# Altium PCB TP3_PCB.PcbDoc
Units mm, origin at the board's own origin, x right, y up, seen from the top; angles counter-clockwise.
Board outline 41.1 x 58.6 mm, 2 copper layers (Top Layer, Bottom Layer); 36 components, 23 nets, 140 pads, 38 vias.
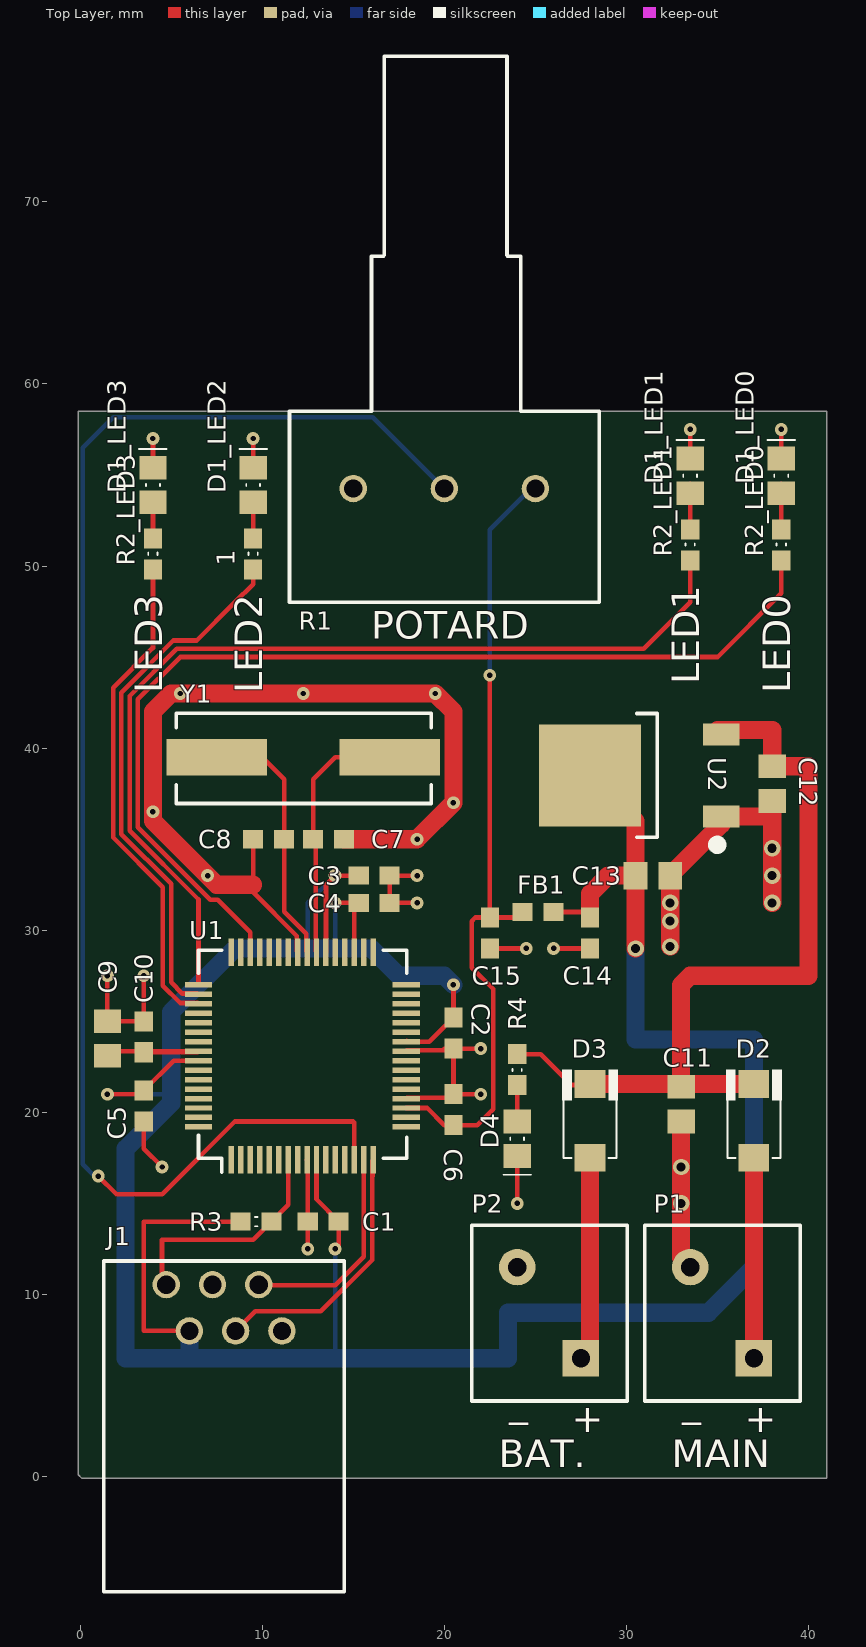
[diagram p0: Top Layer view]
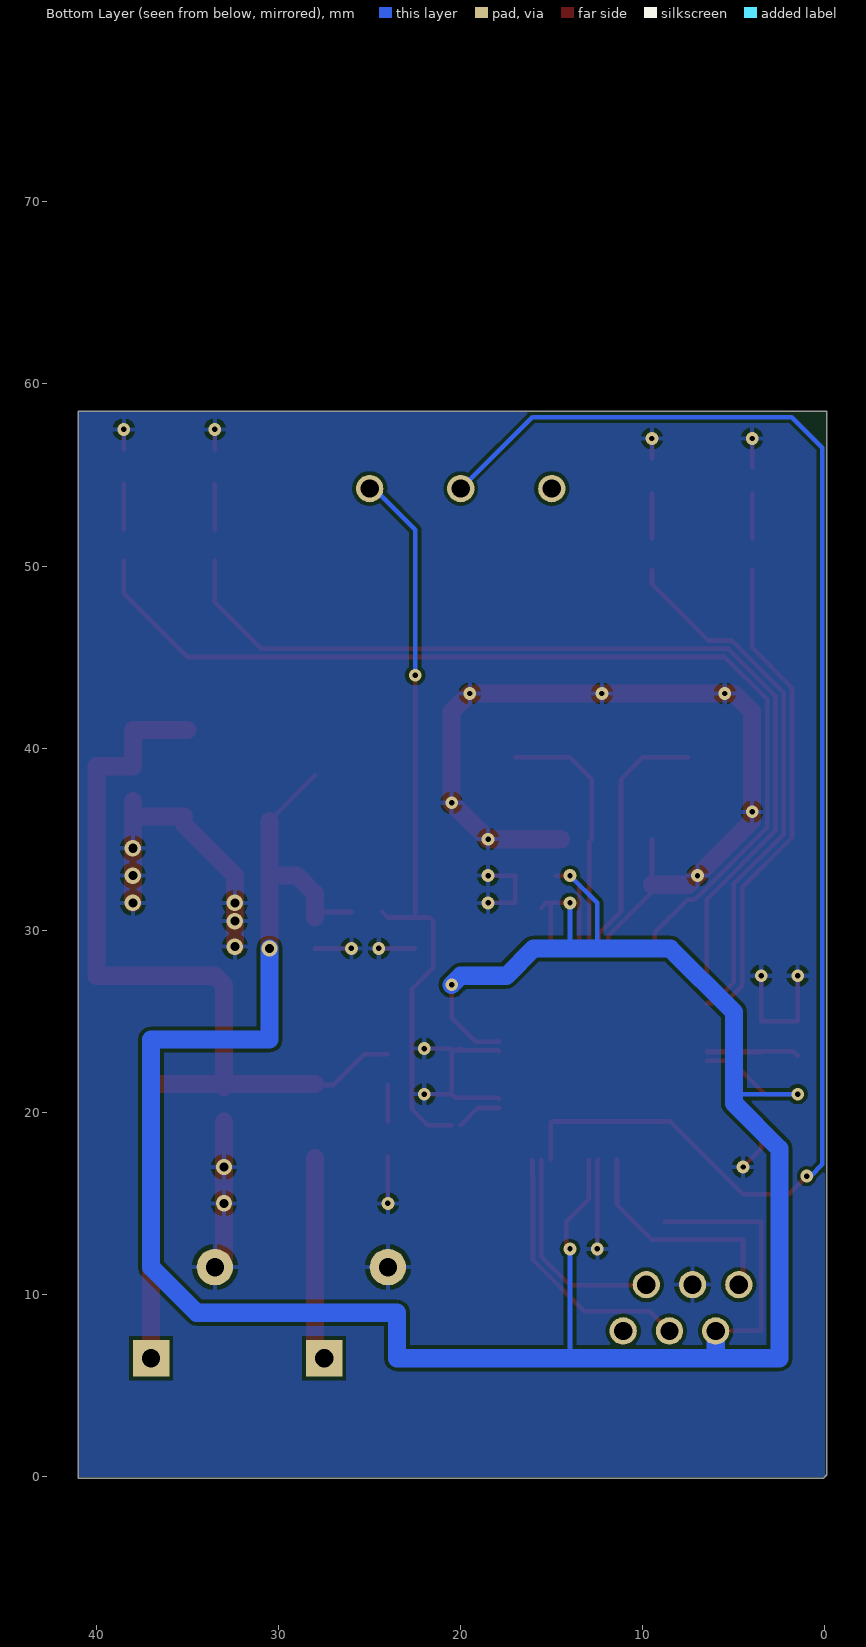
[diagram p1: Bottom Layer view, seen from below]

## Layer stack, top to bottom
Top Solder: solder mask 0.0102, Solder Resist, Dk 3.5
Top Layer: signal copper 0.0356
Dielectric 1: dielectric 0.32, FR-4, Dk 4.8
Bottom Layer: signal copper 0.0356
Bottom Solder: solder mask 0.0102, Solder Resist, Dk 3.5

## Board outline
0.1,-0.1 41,-0.1 41,58.5 -0.1,58.5 -0.1,0.1

## Design rules (kind name [scope] priority, off if disabled: settings)
Clearance [All] p1: gap=0.2
HoleSize [All] p1: absolutevalues=TRUE maxlimit=3 minlimit=0.3 maxpercent=80.000 minpercent=20.000
PolygonConnect [All] p1: connectstyle=Relief reliefconductorwidth=0.254 reliefentries=4 polygonreliefangle="90 Angle" airgapwidth=0.254
RoutingVias [All] p1: holewidth=1 width=1 viastyle="Through Hole" minholewidth=0.3 minwidth=0.7 maxholewidth=3 maxwidth=3
SolderMaskExpansion [All] p1: expansion=0.102
UnpouredPolygon [All] p1: allowunpoured=FALSE
Width [All] p1: maxlimit=3 minlimit=0.2 preferedwidth=0.25
28 further rules are at their usual default settings.

## Classes and differential pairs
component class LED0: D1_LED0 R2_LED0
component class LED1: D1_LED1 R2_LED1
component class LED2: 1 D1_LED2 R2_LED2
component class LED3: D1_LED3 R2_LED3
component class PIC: C1 C2 C3 C4 C5 C6 C7 C8 C9 C10 J1 R3 U1 Y1
component class POWER: C11 C12 C13 C14 C15 D2 D3 D4 FB1 P1 P2 R4 U2
component class TP2: R1
channel class led: LED0 LED1 LED2 LED3

## Components (designator, comment, footprint, x,y, rotation, side; value= is the part's Value field where it differs from the comment)
1 "330r" RESC1608N 9.5,51.5 r270 top (schematic designator R2)
C1 "100nF" CAPC1608N 12.5,14 r0 top
C2 "100nF" CAPC1608N 20.5,23.5 r90 top
C3 "100nF" CAPC1608N 17,33 r180 top
C4 "100nF" CAPC1608N 17,31.5 r180 top
C5 "100nF" CAPC1608N 3.5,19.5 r90 top
C6 "100nF" CAPC1608N 20.5,21 r270 top
C7 "20pF" CAPC1608N 14.5,35 r180 top
C8 "20pF" CAPC1608N 9.5,35 r0 top
C9 "10uF 6.3V" CAPC2012N 1.5,25 r270 top
C10 "1uF 6.3V" CAPC1608N 3.5,25 r270 top
C11 "10uF 6.3V" CAPC2012N 33,19.5 r90 top
C12 "10uF 6.3V" CAPC2012N 38,39 r270 top
C13 "10uF 6.3V" CAPC2012N 30.5,33 r0 top
C14 "1uF 6.3V" CAPC1608N 28,29 r90 top
C15 "100nF" CAPC1608N 22.5,29 r90 top
D1_LED0 "Green LED" "LED 0805" 38.5,54 r90 top (schematic designator D1)
D1_LED1 "Green LED" "LED 0805" 33.5,54 r90 top (schematic designator D1)
D1_LED2 "Green LED" "LED 0805" 9.5,53.5 r90 top (schematic designator D1)
D1_LED3 "Green LED" "LED 0805" 4,53.5 r90 top (schematic designator D1)
D2 "GF1A" SMA/DO-214AC_21 37,17.5 r90 top
D3 "GF1A" SMA/DO-214AC_21 28,17.5 r90 top
D4 "Green LED" "LED 0805" 24,19.5 r270 top
FB1 "600r" INDC1608AN 26,31 r180 top
J1 "Program / Debug" RJ12_90 6,8 r0 top
P1 "12V Main" PHOENIX_1985195 37,6.5 r0 top
P2 "12V Battery" PHOENIX_1985195 27.5,6.5 r0 top
R1 "1K" PDB181-K415K-102A2 11.5,47 r0 top
R2_LED0 "330r" RESC1608N 38.5,52 r270 top (schematic designator R2)
R2_LED1 "330r" RESC1608N 33.5,52 r270 top (schematic designator R2)
R2_LED3 "330r" RESC1608N 4,51.5 r270 top (schematic designator R2)
R3 "4.7k" RESC1608N 10.5,14 r180 top
R4 "470r" RESC1608N 24,21.5 r90 top
U1 "PIC32MX764F128H-I/PT" QFP50P1200X1200X120-64 6.5,27 r0 top
U2 "AP1117" TD03B_N 28,38.5 r90 top
Y1 "8MHz" "HC49/4H SMX CRYSTAL" 17,39.5 r180 top

## Footprints (in the part's own frame and the unit in brackets; to place one, negate y for a bottom-side part, rotate by r counter-clockwise, add the part's x,y. Pads: shape width x height; smd on the part's side, far side on the other; paste and mask are expansions set on the pad)
CAPC1608N [mm]
  rect 1.1x1 smd: 1(0,0) 2(1.7,0)
CAPC2012N [mm]
  rect 1.3x1.5 smd: 1(0,0) 2(1.9,0)
"HC49/4H SMX CRYSTAL" [mm]
  rect 5.5x2 smd: 1(9.5,0) 2(0,0)
  silkscreen extent -2.29,-2.41 11.71,2.54
INDC1608AN [mm]
  rect 1.1x1 smd: 1(0,0) 2(1.7,0)
"LED 0805" [mm]
  rect 1.3x1.5 smd: 1(0,0) 2(1.9,0)
  silkscreen extent 0.89,-0.76 2.92,0.76
PDB181-K415K-102A2 [mm]
  round 1.5 hole 1: 1(13.5,7.25) 2(8.5,7.25) 3(3.5,7.25)
  silkscreen extent 0,1.02 17,30.99
PHOENIX_1985195 [mm]
  rect 2x2 hole 1: 1(0,0)
  round 2 hole 1: 2(-3.5,5)
  silkscreen extent -6,-2.35 2.54,7.3
QFP50P1200X1200X120-64 [mm]
  rect 0.3x1.5 smd: 1(1.8,-9.6) 2(2.32,-9.6) 3(2.84,-9.6) 4(3.36,-9.6) 5(3.88,-9.6) 6(4.4,-9.6) 7(4.92,-9.6) 8(5.44,-9.6) 9(5.96,-9.6) 10(6.48,-9.6) 11(7,-9.6) 12(7.52,-9.6) 13(8.04,-9.6) 14(8.56,-9.6) 15(9.08,-9.6) 16(9.6,-9.6) 33(9.6,1.8) 34(9.08,1.8) 35(8.56,1.8) 36(8.04,1.8) 37(7.52,1.8) 38(7,1.8) 39(6.48,1.8) 40(5.96,1.8) 41(5.44,1.8) 42(4.92,1.8) 43(4.4,1.8) 44(3.88,1.8) 45(3.36,1.8) 46(2.84,1.8) 47(2.32,1.8) 48(1.8,1.8)
  rect 1.5x0.3 smd: 17(11.4,-7.8) 18(11.4,-7.28) 19(11.4,-6.76) 20(11.4,-6.24) 21(11.4,-5.72) 22(11.4,-5.2) 23(11.4,-4.68) 24(11.4,-4.16) 25(11.4,-3.64) 26(11.4,-3.12) 27(11.4,-2.6) 28(11.4,-2.08) 29(11.4,-1.56) 30(11.4,-1.04) 31(11.4,-0.52) 32(11.4,0) 49(0,0) 50(0,-0.52) 51(0,-1.04) 52(0,-1.56) 53(0,-2.08) 54(0,-2.6) 55(0,-3.12) 56(0,-3.64) 57(0,-4.16) 58(0,-4.68) 59(0,-5.2) 60(0,-5.72) 61(0,-6.24) 62(0,-6.76) 63(0,-7.28) 64(0,-7.8)
  silkscreen extent 0,-10.29 11.43,1.91
RESC1608N [mm]
  rect 1.1x1 smd: 1(0,0) 2(1.7,0)
  silkscreen extent 0.76,-0.25 0.89,0.25
RJ12_90 [mm]
  round 1.5 hole 1: 1(-1.27,2.54) 2(0,0) 3(1.27,2.54) 4(2.54,0) 5(3.81,2.54) 6(5.08,0)
  silkscreen extent -4.7,-14.32 8.51,3.84
SMA/DO-214AC_21 [mm]
  rect 1.52x1.68 smd: 1(0,0) 2(4.06,0)
  silkscreen extent 0,-1.52 4.83,1.52
TD03B_N [mm]
  rect 1.2x2 smd: 1(-2.25,-7.2) 3(2.25,-7.2)
  rect 5.6x5.6 smd: 4(0,0)
  silkscreen extent -4.19,-7.37 3.4,-2.57

## Part data
1 R2_LED0 R2_LED1 R2_LED3 R3 R4: library part Res1, "Resistor"
C1 C2 C3 C4 C5 C6 C7 C8 C9 C10 C11 C12 C13 C14 C15: library part Cap, "Capacitor"
D1_LED0 D1_LED1 D1_LED2 D1_LED3 D4: library part LED0, "Typical INFRARED GaAs LED"
D2 D3: library part Diode, "Default Diode"
FB1: library part Inductor, "Inductor"
J1: library part "Header 6", "Header, 6-Pin"
P1 P2: library part "Header 2", "Header, 2-Pin"
R1: library part "RPot SM", "Potentiometer"
U1: "PIC32MX764F128H"
U2: "1A LDO, 18V input, DPAK"
Y1: library part XTAL, "Crystal Oscillator"

## Via types
v1: diameter 0.7, hole 0.3, Top Layer to Bottom Layer, 29 vias
v2: diameter 0.9, hole 0.5, Top Layer to Bottom Layer, 9 vias

## Nets (pads, with @x,y where several pads share a name; then routed paths per layer and width w, separated by ;. In a path a pad name is that pad's centre, name@x,y a point inside that pad or via, vN(x,y) a via of type N, cw(c..) or ccw(c..) an arc to the next point about the centre after c; other vN are vias at no path point)
ALIM: D2.1 P1.1 | length 11
  Top Layer w1: P1.1 D2.1
BATTERY: D3.1 P2.1 | length 11.2
  Top Layer w0.254: P2.1 P2.1@28,7
  Top Layer w1: P2.1@28,7 D3.1
GND: C1.1 C2.1 C3.1 C4.1 C5.1 C6.1 C7.1 C8.1 C9.1 C10.1 C11.1 C12.2 C13.2 C14.1 C15.1 D1_LED0.2 D1_LED1.2 D1_LED2.2 D1_LED3.2 D4.2 J1.3 P1.2 P2.2 U1.9 U1.20 U1.25 U1.41 U2.1 | length 116.3
  Top Layer w0.254: v1(1.5,27.5) C9.1 C10.1 v1(3.5,27.5) ; C5.1 3.5,18 v1(4.5,17) ; D1_LED3.2 v1(4,57) ; C8.1 9.5,32.5 9.5,32.082 11.897,29.685 11.897,28.843 U1.41 ; D1_LED2.2@9.5,55.9 v1(9.5,57) ; U1.9 12.5,17.36 C1.1 v1(12.5,12.5) ; U1.20 17.943,20.803 20.303,20.803 C6.1 ; U1.25 17.943,23.403 C2.1@20.5,23.403 ; v1(18.5,31.5) C4.1 C3.1 v1(18.5,33) ; C2.1@20,23.5 20.482,23.407 C2.1@20.5,23.403 ; C6.1@20.5,20.995 C6.1 ; C2.1 v1(22,23.5) ; v1(22,21) C6.1 ; C15.1 v1(24.5,29) ; v1(24,15) D4.2 ; v1(26,29) C14.1 ; P1.2@33,12 P1.2 ; D1_LED1.2@33.5,56.4 v1(33.5,57.5) ; U2.1@35.2,35.8 U2.1 ; D1_LED0.2@38.5,56.4 v1(38.5,57.5) ; C6.1 C2.1@20.5,23.403
  Top Layer w1: 9.5,32.5 7.5,32.5 4,36 4,42 5,43 v1(19.5,43) 20.5,42 v1(20.5,37) v1(18.5,35) C7.1 ; v2(32.4,29.1) C13.2 U2.1@35.2,35.8 ; P1.2@33,12 C11.1 ; U2.1 38,36.25 ; v2(38,31.5) C12.2
  other v1: 7,33 4,36.5 5.5,43 12.25,43
  other v2: 33,15 33,17 32.4,30.5 32.4,31.5 38,33 38,34.5
LED0: R2_LED0.2 U1.46 | length 56.2
  Top Layer w0.254: U1.46 9.34,29.88 7.547,31.673 7.157,31.673 3.173,35.657 3.173,42.673 5.5,45 35,45 38.5,48.5 R2_LED0.2
LED1: R2_LED1.2 U1.49 | length 52.6
  Top Layer w0.254: U1.49 6.5,31.688 2.719,35.469 2.719,42.861 5.312,45.454 30.954,45.454 33.5,48 R2_LED1.2
LED2: 1.2 U1.50 | length 29.7
  Top Layer w0.254: U1.50 6.457,26.523 5.615,26.523 5,27.138 5,32.546 2.265,35.281 2.265,43.049 5.124,45.908 6.408,45.908 8.5,48 ; 8.25,47.75 8.5,48 ; 1.2 9.5,49 8.5,48
LED3: R2_LED3.2 U1.51 | length 27.3
  Top Layer w0.254: R2_LED3.2 4,45.5 1.811,43.311 1.811,35.093 4.546,32.358 4.546,26.949 5.493,26.003 6.457,26.003 U1.51
MCLR: J1.1 R3.1 U1.7 | length 12.8
  Top Layer w0.254: J1.1 4.5,10.77 4.5,13 9.5,13 R3.1 11.42,14.92 U1.7
NetC9_2: C9.2 C10.2 U1.56 | length 8.1
  Top Layer w0.254: C9.2 1.76,23.36 U1.56 6.457,23.317 3.5,23.317 C10.2
NetD1_LED0_1: D1_LED0.1 R2_LED0.1 | length 2.5
  Top Layer w0.254: R2_LED0.1 D1_LED0.1@38.5,54.5
NetD1_LED1_1: D1_LED1.1 R2_LED1.1 | length 2.5
  Top Layer w0.254: R2_LED1.1 D1_LED1.1@33.5,54.5
NetD1_LED2_1: 1.1 D1_LED2.1 | length 2.5
  Top Layer w0.254: 1.1 D1_LED2.1@9.5,54
NetD1_LED3_1: D1_LED3.1 R2_LED3.1 | length 2.5
  Top Layer w0.254: R2_LED3.1 D1_LED3.1@4,54
NetD4_1: D4.1 R4.1 | length 2
  Top Layer w0.254: D4.1 R4.1
NetR1_2: R1.2 U1.14 | length 80.8
  Top Layer w0.254: v1(1,16.5) 2,15.5 4.5,15.5 8.5,19.5 15,19.5 15.06,19.44 U1.14
  Bottom Layer w0.254: v1(1,16.5) 0.792,16.5 0.146,17.146 0.146,56.5 1.823,58.177 16.073,58.177 R1.2
PGC: J1.5 U1.15 | length 11.8
  Top Layer w0.254: J1.5 9.85,10.5 14,10.5 15.58,12.08 U1.15
PGD: J1.4 U1.16 | length 14.6
  Top Layer w0.254: J1.4 9.617,9.077 13.219,9.077 16.034,11.892 16.034,16.469 16.057,16.492 16.057,17.357 U1.16
V3P3: C1.2 C2.2 C3.2 C4.2 C5.2 C13.1 C14.2 FB1.1 J1.2 R3.2 U1.10 U1.26 U1.35 U1.38 U1.57 U2.4 | length 173.2
  Top Layer w0.254: v1(1.5,21) 3.3,21 C5.2 5.14,22.84 U1.57 ; J1.2 3.5,8 3.5,14 R3.2 ; U1.10 12.98,15.22 C1.2 v1@14.2,12.7 ; U1.38 13.5,32.5 v1(14,33) C3.2@14.8,33 ; v1(14,31.5) C4.2@15.06,31.5 ; U1.35 C4.2@15.06,31.5 ; C4.2@15.56,31.24 C4.2 C4.2@15.06,31.5 ; U1.26@17.943,23.923 U1.26 19.18,23.88 C2.2 v1(20.5,27) ; FB1.1 27.7,31 C14.2 ; U2.4 U2.4@30.5,36
  Top Layer w1: C14.2 28,32 29,33 C13.1 ; v2(30.5,29) C13.1 ; U2.4@30.5,36 C13.1
  Bottom Layer w0.254: v1(1.5,21) 4.5,21 ; 12.5,29 12.5,31.5 v1(14,33) ; 14,7 v1(14,12.5) ; 14,29 v1(14,31.5)
  Bottom Layer w1: J1.2 6,6.5 ; v1(20.5,27) 20,27.5 17.5,27.5 16,29 14,29 12.5,29 8.5,29 5,25.5 5,20.5 2.5,18 2.5,6.5 6,6.5 ; v2(30.5,29) 30.5,24 37,24 37,11.5 34.5,9 23.5,9 23.5,6.5 6,6.5
V3P3A: C6.2 C15.2 FB1.2 R1.1 U1.19 | length 43.6
  Top Layer w0.254: U1.19 19.06,20.24 C6.2@20,19.3 ; C6.2 21.8,19.3 22.677,20.177 22.677,26.773 21.5,27.95 21.5,30.5 21.7,30.7 C15.2 ; v1(22.5,44) C15.2 ; FB1.2 24,30.7 C15.2
  Bottom Layer w0.254: v1(22.5,44) 22.5,52 24.75,54.25 R1.1
V5: C11.2 C12.1 D2.2 D3.2 R4.2 U2.3 | length 45
  Top Layer w0.254: R4.2 25.3,23.2 27,21.5 27.94,21.5 D3.2
  Top Layer w1: D3.2 C11.2@33,21.56 ; C11.2 C11.2@33,21.56 ; U2.3@35,41 38,41 C12.1 40,39 40,27.5 33.5,27.5 33,27 C11.2@33,21.56 ; D2.2 C11.2@33,21.56
VCC: R1.3
X1: C7.2 U1.39 Y1.2 | length 14.3
  Top Layer w0.254: U1.39 12.937,28.843 12.937,34.863 C7.2 12.8,38.3 14,39.5 Y1.2
X2: C8.2 U1.40 Y1.1 | length 14.2
  Top Layer w0.254: Y1.1 10,39.5 11.2,38.3 C8.2 11.2,31.024 12.417,29.807 12.417,28.843 U1.40
pads on no net: J1.6 U1.1 U1.2 U1.3 U1.4 U1.5 U1.6 U1.8 U1.11 U1.12 U1.13 U1.17 U1.18 U1.21 U1.22 U1.23 U1.24 U1.27 U1.28 U1.29 U1.30 U1.31 U1.32 U1.33 U1.34 U1.36 U1.37 U1.42 U1.43 U1.44 U1.45 U1.47 U1.48 U1.52 U1.53 U1.54 U1.55 U1.58 U1.59 U1.60 U1.61 U1.62 U1.63 U1.64

## Polygon pours and split planes (outlines as drawn)
GND on Bottom Layer "gnd plan" (solid, pour order 16): 0,0 41,0 41,58.5 0,58.5

## Silkscreen, mask and mechanical layers (free items; w line width, h text height)
Top Overlay:
  text "POTARD" at 16,46 h1.52
  text "LED1" at 34,43.5 h1.52 r90
  text "LED3" at 4.5,43 h1.52 r90
  text "LED2" at 10,43 h1.52 r90
  text "LED0" at 39,43 h1.52 r90
  text "BAT." at 23,0.5 h1.52
  text "MAIN" at 32.5,0.5 h1.52
Drill Drawing:
  lines w0.025: 47.23,7.223 48.5,7.223 47.865,5.953 47.23,7.223 ; 47.23,9.763 48.5,9.763 48.5,11.033 47.23,11.033 47.23,9.763 ; 47.23,13.891 47.548,13.891 47.865,13.573 48.183,13.891 48.5,13.891 48.183,14.208 48.5,14.526 48.183,14.526 47.865,14.843 47.548,14.526 47.23,14.526 47.548,14.208 47.23,13.891
  lines w0.381: 45.5,4.81 144.026,4.81 ; 45.5,16.24 144.026,16.24 ; 59.492,1 59.492,20.05 ; 77.217,1 77.217,20.05 ; 111.395,1 111.395,20.05 ; 124.244,1 124.244,20.05 ; 45.5,1 144.026,1 144.026,20.05 45.5,20.05 45.5,1
  text "Symbol" at 47.786,17.383 h1.83
  text "Hit Count" at 60.635,17.383 h1.83
  text "Finished Hole Size" at 78.36,17.383 h1.83
  text "Plated" at 112.538,17.383 h1.83
  text "Hole Type" at 125.387,17.383 h1.83
  text "9" at 60.635,13.573 h1.52
  text "0.500mm (19.69mil)" at 78.36,13.573 h1.52
  text "PTH" at 112.538,13.573 h1.52
  text "Round" at 125.387,13.573 h1.52
  text "13" at 60.635,9.763 h1.52
  text "1.000mm (39.37mil)" at 78.36,9.763 h1.52
  text "PTH" at 112.538,9.763 h1.52
  text "Round" at 125.387,9.763 h1.52
  text "29" at 60.635,5.953 h1.52
  text "0.300mm (11.81mil)" at 78.36,5.953 h1.52
  text "PTH" at 112.538,5.953 h1.52
  text "Round" at 125.387,5.953 h1.52
  text "51 Total" at 60.635,2.143 h1.52

## Text inside footprints (layer, text, board x,y; h text height)
P1: Top Overlay "_" at 33.063,3.325 h1.52; Top Overlay "+" at 36.492,2.436 h1.52
P2: Top Overlay "_" at 23.563,3.325 h1.52; Top Overlay "+" at 26.992,2.436 h1.52